# EAGLE board Schematic1 (EAGLE 9.3.0)
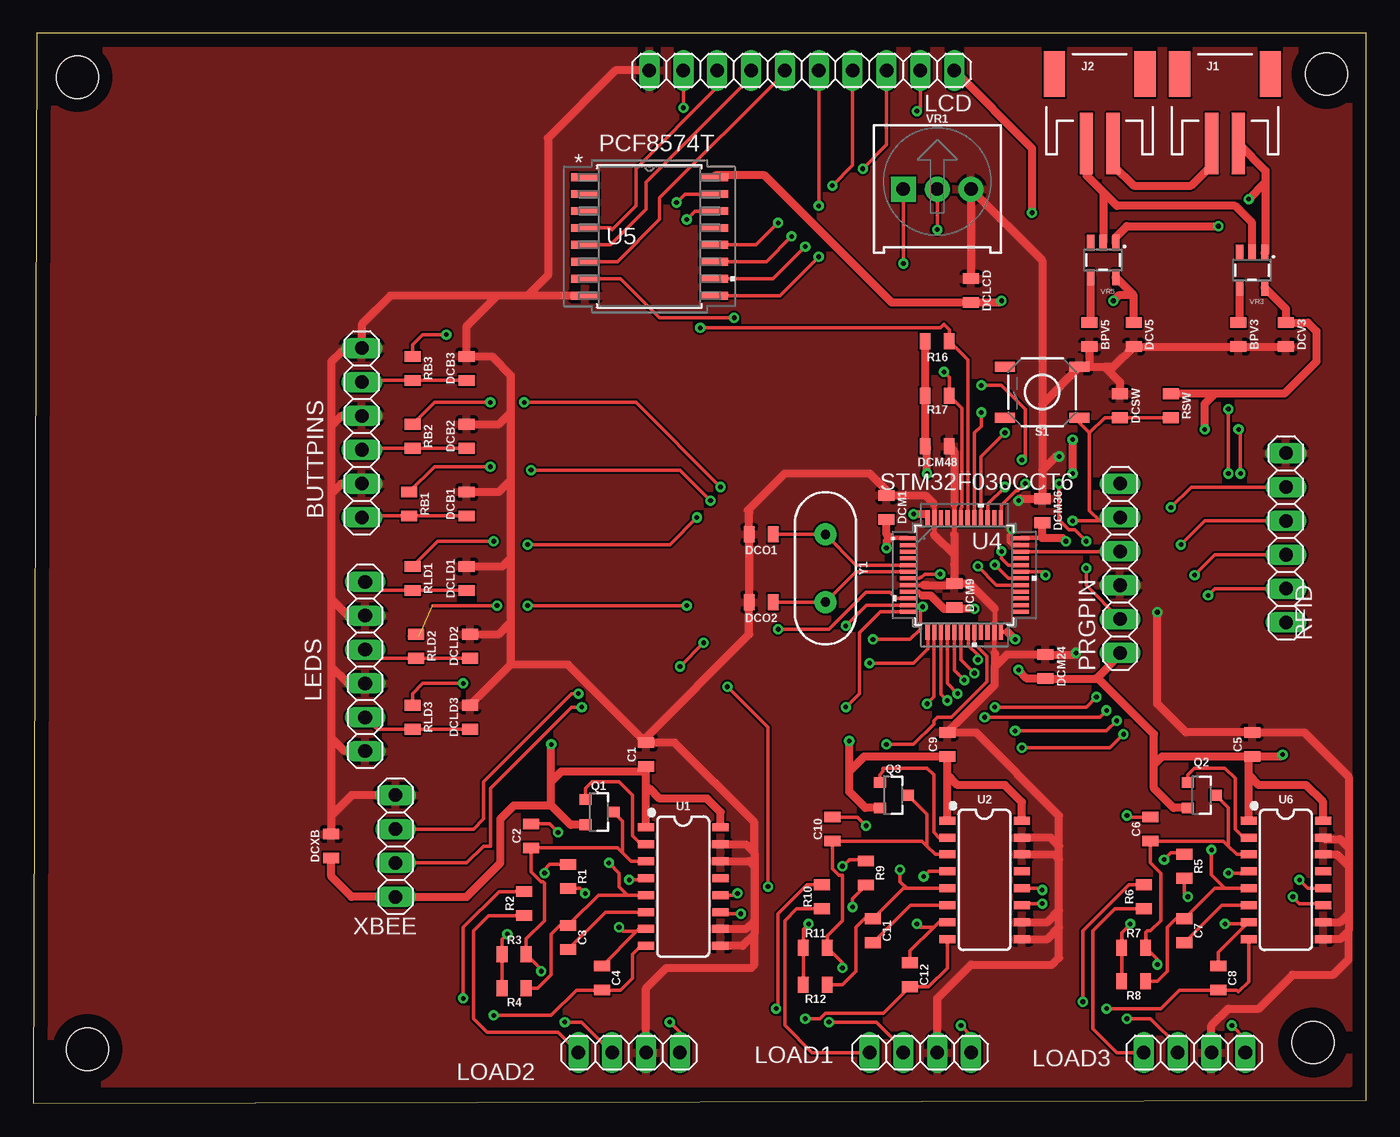
[diagram p0: board, top side]
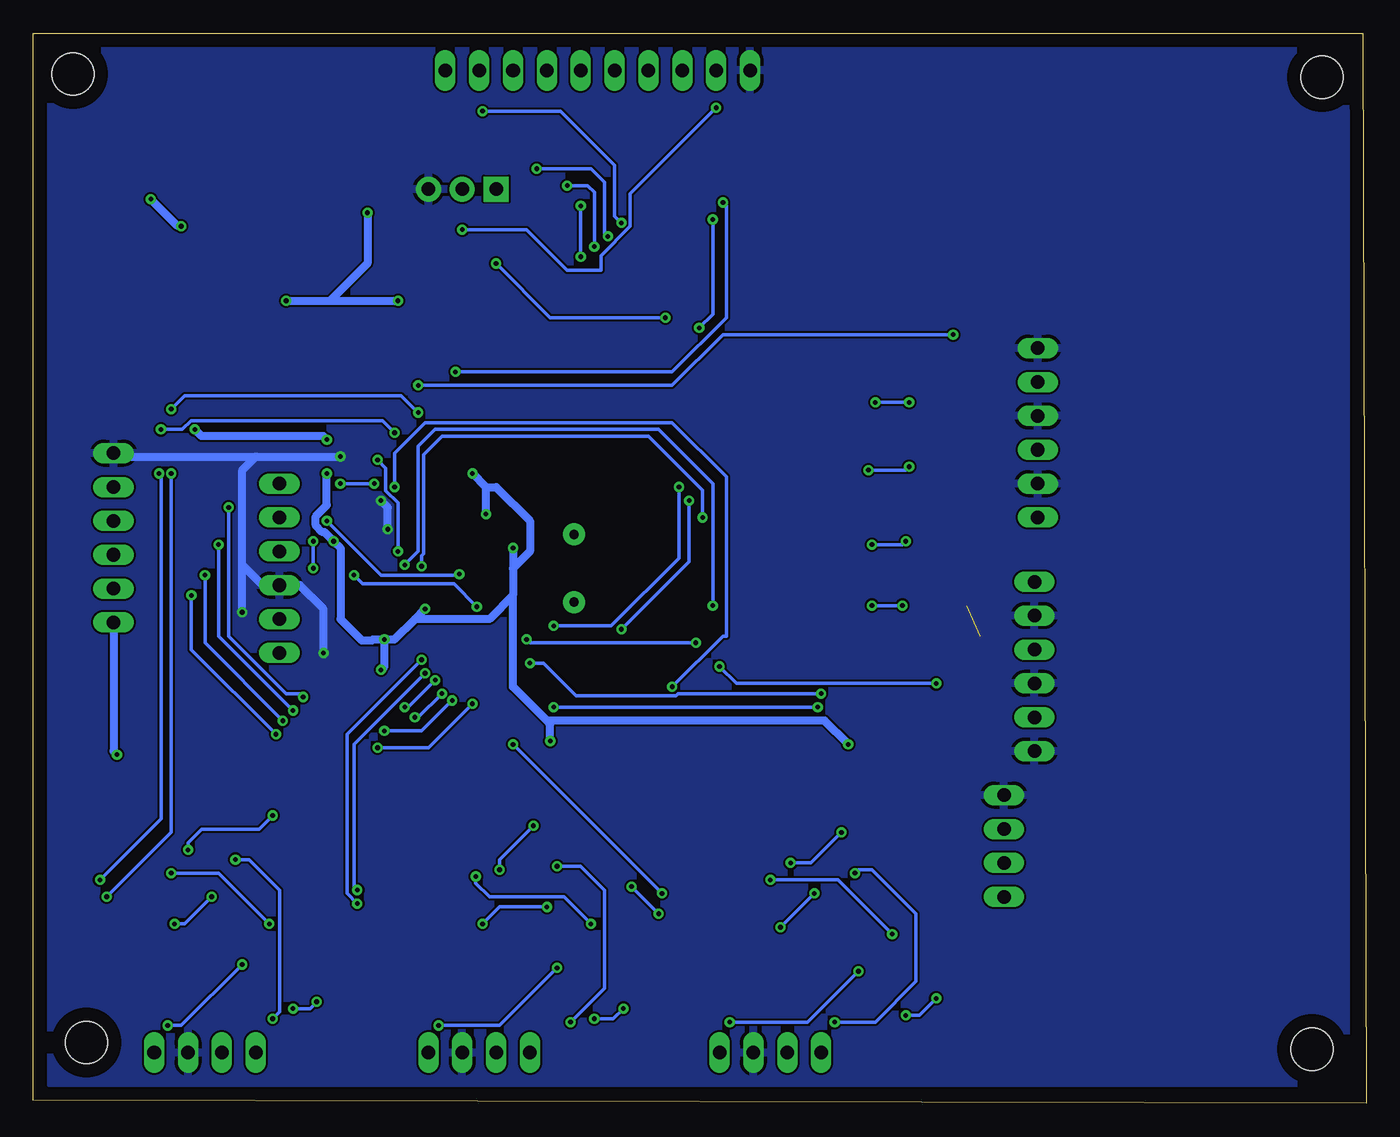
[diagram p1: board, bottom side, seen from below]

Size 100 x 80.25 mm. Coordinates in mm from the lower left corner, seen from the top.
Outline: 0,0 100,0.25 100,80.25 0.25,80.25 0,0
Copper layers (1*16): Top 0.035mm / dielectric 1.5mm / Bottom 0.035mm
Design rules "default": minimum track width 6mil, minimum drill 0.35mm, track to track 6mil, track to pad 6mil, pad to pad 6mil, via to via 6mil, smd to smd 6mil, copper to edge 40mil, drill to drill 6mil, minimum pad ring 10mil, minimum via ring 8mil, stop-mask expansion 4mil, vias tented up to drill 0mil, thermal gap 10mil
Holes 3.17 mm at 3.3,76.96 4.06,4.06 96.01,4.57 97.03,77.22

## Footprints (pad centres in the part's own frame; a part is rotated, then mirrored left to right if it is on the bottom)
0805 = smd 0.8 x 1.2: 1 -0.9,0; 2 0.9,0
1X06 = drill 1.016 long: 1 -6.35,0; 2 -3.81,0; 3 -1.27,0; 4 1.27,0; 5 3.81,0; 6 6.35,0
JST-2-SMD = smd 1 x 4.6: 1 -1,-3.7; 2 1,-3.7 | smd 1.6 x 3.4: NC1 -3.4,1.5; NC2 3.4,1.5
1X10 = drill 1.016 long: 1 -11.43,0; 2 -8.89,0; 3 -6.35,0; 4 -3.81,0; 5 -1.27,0; 6 1.27,0; 7 3.81,0; 8 6.35,0; 9 8.89,0; 10 11.43,0
1X04 = drill 1.016 long: 1 -3.81,0; 2 -1.27,0; 3 1.27,0; 4 3.81,0
SOT23-3 = smd 0.8 x 0.9: 1 -0.95,-1; 2 0.95,-1; 3 0,1.1
TACTILE_SWITCH_SMD_5.2MM = smd 1.524 x 0.762: 1 -2.794,1.905; 2 2.794,1.905; 3 -2.794,-1.905; 4 2.794,-1.905
SO16 = smd 0.6 x 1.2: 1 -4.445,-2.8; 2 -3.175,-2.8; 3 -1.905,-2.8; 4 -0.635,-2.8; 5 0.635,-2.8; 6 1.905,-2.8; 7 3.175,-2.8; 8 4.445,-2.8; 9 4.445,2.8; 10 3.175,2.8; 11 1.905,2.8; 12 0.635,2.8; 13 -0.635,2.8; 14 -1.905,2.8; 15 -3.175,2.8; 16 -4.445,2.8
LQFP48-7X7MM = smd 1.194 x 0.305: 1 -4.25,2.75; 2 -4.25,2.25; 3 -4.25,1.75; 4 -4.25,1.25; 5 -4.25,0.75; 6 -4.25,0.25; 7 -4.25,-0.25; 8 -4.25,-0.75; 9 -4.25,-1.25; 10 -4.25,-1.75; 11 -4.25,-2.25; 12 -4.25,-2.75; 25 4.25,-2.75; 26 4.25,-2.25; 27 4.25,-1.75; 28 4.25,-1.25; 29 4.25,-0.75; 30 4.25,-0.25; 31 4.25,0.25; 32 4.25,0.75; 33 4.25,1.25; 34 4.25,1.75; 35 4.25,2.25; 36 4.25,2.75 | smd 0.305 x 1.194: 13 -2.75,-4.25; 14 -2.25,-4.25; 15 -1.75,-4.25; 16 -1.25,-4.25; 17 -0.75,-4.25; 18 -0.25,-4.25; 19 0.25,-4.25; 20 0.75,-4.25; 21 1.25,-4.25; 22 1.75,-4.25; 23 2.25,-4.25; 24 2.75,-4.25; 37 2.75,4.25; 38 2.25,4.25; 39 1.75,4.25; 40 1.25,4.25; 41 0.75,4.25; 42 0.25,4.25; 43 -0.25,4.25; 44 -0.75,4.25; 45 -1.25,4.25; 46 -1.75,4.25; 47 -2.25,4.25; 48 -2.75,4.25
SOT162-1-M = smd 2.108 x 0.584: 1 -4.826,4.445; 2 -4.826,3.175; 3 -4.826,1.905; 4 -4.826,0.635; 5 -4.826,-0.635; 6 -4.826,-1.905; 7 -4.826,-3.175; 8 -4.826,-4.445; 9 4.826,-4.445; 10 4.826,-3.175; 11 4.826,-1.905; 12 4.826,-0.635; 13 4.826,0.635; 14 4.826,1.905; 15 4.826,3.175; 16 4.826,4.445
TRIMPOT-PTH-3386U = drill 1.016 pad 1.88 square: 1 -2.54,-0.015 | drill 1.016 pad 1.88: 2 0,-0.015; 3 2.54,-0.015
SOT23-5 = smd 0.55 x 1.2: 1 -0.95,-1.3; 2 0,-1.3; 3 0.95,-1.3; 4 0.95,1.3; 5 -0.95,1.3
HC49US = drill 0.7 pad 1.651: 1 -2.54,0; 2 2.54,0

## Placement (x,y rotation side)
BPV3  470pF  [0805]  90.42,57.66 270 top
BPV5  470pF  [0805]  79.25,57.66 270 top
BUTTPINS  [1X06]  24.64,50.29 90 top
C1  10µF  [0805]  45.97,26.16 90 top
C2  10µF  [0805]  37.34,20.07 90 top
C3  0.1µF  [0805]  40.13,12.45 270 top
C4  0.1µF  [0805]  42.67,9.4 270 top
C5  10µF  [0805]  91.44,26.92 90 top
C6  10µF  [0805]  83.82,20.57 90 top
C7  0.1µF  [0805]  86.36,12.95 270 top
C8  0.1µF  [0805]  88.9,9.4 270 top
C9  10µF  [0805]  68.58,26.92 90 top
C10  10µF  [0805]  59.94,20.57 90 top
C11  0.1µF  [0805]  62.99,12.95 270 top
C12  0.1µF  [0805]  65.79,9.65 270 top
DCB1  0.33µF  [0805]  32.51,44.96 90 top
DCB2  0.33µF  [0805]  32.51,50.04 90 top
DCB3  0.33µF  [0805]  32.51,55.12 90 top
DCLCD  0.33µF  [0805]  70.36,60.96 270 top
DCLD1  0.33µF  [0805]  32.51,39.37 90 top
DCLD2  0.33µF  [0805]  32.77,34.29 90 top
DCLD3  0.33µF  [0805]  32.77,28.96 90 top
DCM1  0.33µF  [0805]  64.01,44.7 270 top
DCM9  0.33µF  [0805]  69.09,38.1 270 top
DCM24  0.33µF  [0805]  75.95,32.77 270 top
DCM36  0.33µF  [0805]  75.69,44.45 270 top
DCM48  0.33µF  [0805]  67.82,49.28 180 top
DCO1  0.33µF  [0805]  54.61,42.67 180 top
DCO2  0.33µF  [0805]  54.61,37.59 180 top
DCSW  0.33µF  [0805]  81.53,52.32 270 top
DCV3  2.2µF  [0805]  93.98,57.66 270 top
DCV5  2.2µF  [0805]  82.55,57.66 270 top
DCXB  2.2µF  [0805]  22.35,19.3 90 top
J1  [JST-2-SMD]  89.41,75.69 0 top
J2  [JST-2-SMD]  80.01,75.69 0 top
LCD  [1X10]  57.66,77.47 180 top
LEDS  [1X06]  24.89,32.77 270 top
LOAD1  [1X04]  66.55,3.81 180 top
LOAD2  [1X04]  44.7,3.81 180 top
LOAD3  [1X04]  87.12,3.81 180 top
PRGPIN  [1X06]  81.53,40.13 90 top
Q1  600mA/40V  [SOT23-3]  42.42,21.84 270 top
Q2  600mA/40V  [SOT23-3]  87.63,23.11 270 top
Q3  600mA/40V  [SOT23-3]  64.52,23.11 270 top
R1  [0805]  40.13,17.02 270 top
R2  [0805]  36.83,14.99 90 top
R3  [0805]  36.07,11.18 0 top
R4  [0805]  36.07,8.64 180 top
R5  [0805]  86.36,17.78 270 top
R6  [0805]  83.31,15.49 90 top
R7  [0805]  82.55,11.68 0 top
R8  [0805]  82.55,9.14 180 top
R9  [0805]  62.48,17.27 270 top
R10  [0805]  59.18,15.49 90 top
R11  [0805]  58.67,11.68 0 top
R12  [0805]  58.67,8.89 180 top
R16  4.7k  [0805]  67.82,57.15 180 top
R17  4.7k  [0805]  67.82,53.09 180 top
RB1  1k  [0805]  28.19,44.96 270 top
RB2  1k  [0805]  28.45,50.04 270 top
RB3  1k  [0805]  28.45,55.12 270 top
RFID  [1X06]  93.98,42.42 90 top
RLD1  1k  [0805]  28.45,39.37 270 top
RLD2  1k  [0805]  28.7,34.29 270 top
RLD3  1k  [0805]  28.45,28.96 270 top
RSW  10k  [0805]  85.34,52.32 270 top
S1  [TACTILE_SWITCH_SMD_5.2MM]  75.69,53.34 180 top
U1  HX711  [SO16]  48.77,16.26 270 top
U2  HX711  [SO16]  71.37,16.76 270 top
U4  STM32F0XXC1T  [LQFP48-7X7MM]  69.85,39.62 0 top
U5  PCF8574T/3,512SOT162-1-M  [SOT162-1-M]  46.23,65.02 0 top
U6  HX711  [SO16]  93.98,16.76 270 top
VR1  10k  [TRIMPOT-PTH-3386U]  67.82,68.58 0 top
VR3  3.3V/150mA  [SOT23-5]  91.44,62.48 180 top
VR5  5V  [SOT23-5]  80.26,63.25 180 top
XBEE  [1X04]  27.18,19.3 90 top
Y1  [HC49US]  59.44,40.13 270 top

## Library data of the parts
BPV3 BPV5 DCB1-DCB3 DCLCD DCLD1-DCLD3 DCM1 DCM9 DCM24 DCM36 DCM48 DCO1 DCO2 DCSW DCV3 DCV5 DCXB = SparkFun-Capacitors; PROD_ID: CAP-08469
BUTTPINS LCD LEDS LOAD1-LOAD3 PRGPIN RFID XBEE = pinhead
C1-C12 = SparkFun-Capacitors; PROD_ID: CAP-08469; VALUE: 0.33µF
J1 J2 = SparkFun-Connectors; PROD_ID: CONN-11443; SF_ID: PRT-08612
Q1-Q3 = SparkFun-DiscreteSemi; PROD_ID: TRANS-09245
R1-R12 R16 R17 RB1-RB3 RLD1-RLD3 RSW = SparkFun-Resistors
S1 = SparkFun-Switches; PROD_ID: SWCH-08247; SF_SKU: COM-08720
U1 U2 U6 = SparkFun-IC-Conversion; PROD_ID: IC-12445
U4 = ECE477_Resources; MANUFACTURER_PART_NUMBER: stm32f0xxc1t; VENDOR: STMicroelectronics
U5 = ECE477_Resources; MANUFACTURER_PART_NUMBER: PCF8574T3512; VENDOR: NXP
VR1 = SparkFun-Resistors; PROD_ID: RES-09730; SF_SKU: COM-09806
VR3 = SparkFun-IC-Power; PROD_ID: VREG-00822
VR5 = SparkFun-IC-Power; PROD_ID: VREG-00823
Y1 = SparkFun-Clocks

## Nets
A: U5.7 VR1.1
A0: RB1.1 U4.10
A1: RB2.1 U4.11
A2: U4.12 XBEE.2
A3: U4.13 XBEE.3
A4: RFID.2 U4.14
A5: RFID.3 U4.15
A6: RFID.4 U4.16
A7: RFID.5 U4.17
A8: RLD1.1 U4.29
A9: RLD2.1 U4.30
A10: RLD3.1 U4.31
A11: RB3.1 U4.32
B: LCD.9 VR1.2
B6: R16.1 U4.42 U5.14
B7: R17.1 U4.43 U5.15
D0: LCD.8 U5.4
D1: LCD.7 U5.5
D2: LCD.6 U5.6
D4: LCD.5 U5.9
D5: LCD.4 U5.10
D6: LCD.3 U5.11
D7: LCD.2 U5.12
GND: BPV3.2 BPV5.2 BUTTPINS.2 BUTTPINS.4 BUTTPINS.6 C1.2 C5.2 C9.2 DCB1.2 DCB2.2 DCB3.2 DCLCD.1 DCLD1.2 DCLD2.2 DCLD3.2 DCM1.1 DCM9.1 DCM24.1 DCM36.1 DCM48.1 DCO1.2 DCO2.2 DCSW.1 DCV3.2 DCV5.2 DCXB.2 LCD.10 LEDS.2 LEDS.4 LEDS.6 LOAD1.2 LOAD2.2 LOAD3.2 PRGPIN.3 RFID.6 S1.3 U1.9 U1.10 U1.14 U1.15 U2.9 U2.10 U2.14 U2.15 U4.8 U4.23 U4.35 U4.44 U4.47 U5.8 U6.9 U6.10 U6.14 U6.15 VR1.3 XBEE.4
GND_IN: J2.1 VR3.2 VR5.2
N$1: J1.1 J2.2
N$2: LOAD2.3 R1.1
N$3: LOAD2.4 R2.1
N$4: C4.1 R1.2 U1.7
N$5: C4.2 R2.2 U1.8
N$6: Q1.1 U1.2
N$7: C2.1 LOAD2.1 Q1.3 R3.2 U1.3
N$8: C2.2 C3.1 R4.1 U1.5
N$9: R3.1 R4.2 U1.4
N$10: DCLD1.1 LEDS.1 RLD1.2
N$11: C3.2 U1.6
N$12: LOAD3.3 R5.1
N$13: LOAD3.4 R6.1
N$14: C8.1 R5.2 U6.7
N$15: C8.2 R6.2 U6.8
N$16: Q2.1 U6.2
N$17: C6.1 LOAD3.1 Q2.3 R7.2 U6.3
N$18: C6.2 C7.1 R8.1 U6.5
N$19: R7.1 R8.2 U6.4
N$20: C7.2 U6.6
N$21: DCO1.1 U4.5 Y1.1
N$22: DCO2.1 U4.6 Y1.2
N$23: LOAD1.3 R9.1
N$24: LOAD1.4 R10.1
N$25: C12.1 R9.2 U2.7
N$26: C12.2 R10.2 U2.8
N$27: Q3.1 U2.2
N$28: C10.1 LOAD1.1 Q3.3 R11.2 U2.3
N$29: C10.2 C11.1 R12.1 U2.5
N$30: R11.1 R12.2 U2.4
N$31: C11.2 U2.6
N$32: DCLD2.1 LEDS.3 RLD2.2
N$33: DCLD3.1 LEDS.5 RLD3.2
N$34: BPV3.1 VR3.4
N$35: BUTTPINS.1 DCB1.1 RB1.2
N$36: BUTTPINS.3 DCB2.1 RB2.2
N$37: BPV5.1 VR5.4
N$38: BUTTPINS.5 DCB3.1 RB3.2
N$54: U4.41 U6.11
N$55: U4.40 U6.12
N$56: U1.11 U4.39
N$57: U1.12 U4.20
N$58: U2.11 U4.19
N$59: U2.12 U4.18
P3V: C1.1 C5.1 C9.1 DCM1.2 DCM9.2 DCM24.2 DCM36.2 DCM48.2 DCV3.1 DCXB.1 PRGPIN.1 Q1.2 Q2.2 Q3.2 R16.2 R17.2 RFID.1 RSW.1 U1.1 U1.16 U2.1 U2.16 U4.1 U4.9 U4.24 U4.36 U4.48 U6.1 U6.16 VR3.5 XBEE.1
P5V: DCLCD.2 DCV5.1 LCD.1 U5.16 VR5.5
PWR_IN: J1.2 VR3.1 VR5.1
RST: DCSW.2 PRGPIN.5 RSW.2 S1.1 U4.7
SWCLK: PRGPIN.2 U4.37
SWDIO: PRGPIN.4 U4.34

## Tracks (layer width: path | path; a pad name or v marks a point on that pad's centre or on a via)
A  (via drill 0.35)
  Top 0.254: U5.7 44.07,61.85 46.99,58.93 v52.58,58.93 | v65.28,62.99 VR1.1
  Bottom 0.254: v52.58,58.93 61.21,58.93 v65.28,62.99
A0  (via drill 0.35)
  Top 0.254: U4.10 64.74,37.87 64.26,38.35 62.48,38.35 59.69,35.56 v55.88,35.56 | v50.8,45.21 48.51,47.5 v37.34,47.5 | v34.29,47.75 30.09,47.75 RB1.1
  Bottom 0.254: v55.88,35.56 50.8,40.64 v50.8,45.21 | v37.34,47.5 34.54,47.5 v34.29,47.75
A1  (via drill 0.35)
  Top 0.254: U4.11 62.52,37.37 v60.96,35.81 | v51.56,46.23 45.21,52.58 v36.83,52.58 | v34.29,52.58 30.09,52.58 RB2.1
  Bottom 0.254: v60.96,35.81 56.64,35.81 51.56,40.89 v51.56,46.23 | v36.83,52.58 v34.29,52.58
A2  (via drill 0.35)
  Top 0.254: XBEE.2 32.51,18.03 33.78,19.3 34.29,19.3 34.29,23.62 40.39,29.72 v41.15,29.72 | v60.96,29.72 61.98,30.73 61.98,35.31 63.54,36.87 U4.12
  Bottom 0.254: v41.15,29.72 v60.96,29.72
A3  (via drill 0.35)
  Top 0.254: XBEE.3 33.02,20.57 33.78,21.34 33.78,24.13 40.39,30.73 v40.89,30.73 | v62.74,33.02 66.04,33.02 67.1,34.08 U4.13
  Bottom 0.254: v40.89,30.73 51.65,30.73 51.8,30.58 59.29,30.58 61.72,33.02 v62.74,33.02
A4  (via drill 0.35)
  Top 0.254: U4.14 67.56,35.34 67.56,33.27 67.56,33.02 67.56,30.48 v67.06,29.97 | v74.17,26.67 80.77,26.67 v81.79,27.69 | v88.14,38.1 88.65,38.61 RFID.2
  Bottom 0.254: v67.06,29.97 70.36,26.67 v74.17,26.67 | v81.79,27.69 88.14,34.04 v88.14,38.1
A5  (via drill 0.35)
  Top 0.254: U4.15 68.1,30.69 v68.57,30.22 | v73.66,27.94 80.52,27.94 v81.28,28.7 | v87.12,39.62 88.65,41.15 RFID.3
  Bottom 0.254: v68.57,30.22 70.85,27.94 v73.66,27.94 | v81.28,28.7 87.12,34.54 v87.12,39.62
A6  (via drill 0.35)
  Top 0.254: U4.16 68.58,35.35 68.58,31.5 v69.34,30.73 | v71.37,28.96 80.01,28.96 v80.52,29.46 | v86.11,41.91 87.88,43.69 RFID.4
  Bottom 0.254: v69.34,30.73 71.12,28.96 v71.37,28.96 | v80.52,29.46 86.11,35.05 v86.11,41.91
A7  (via drill 0.35)
  Top 0.254: U4.17 69.1,33.27 69.1,33.03 69.1,32.48 69.33,32.25 v69.84,31.74 | v72.14,29.72 78.99,29.72 v79.76,30.48 | v85.34,44.7 86.87,46.23 RFID.5
  Bottom 0.254: v69.84,31.74 71.87,29.72 v72.14,29.72 | v79.76,30.48 80.01,30.73 81.03,30.73 85.34,35.05 v85.34,44.7
A8  (via drill 0.35)
  Top 0.254: U4.29 72.27,38.87 v70.87,40.28 | v49.78,43.94 47.75,41.91 v37.08,41.91 | v34.54,42.16 30.34,42.16 RLD1.1
  Bottom 0.254: v70.87,40.28 70.87,41.08 70.71,41.23 70.71,48.67 69.34,50.04 53.85,50.04 49.78,45.97 v49.78,43.94 | v37.08,41.91 34.8,41.91 v34.54,42.16
A9  (via drill 0.35)  (1 unrouted)
  Top 0.254: U4.30 73.15,39.37 v72.14,40.39 | v49.02,37.34 37.34,37.34 | 28.96,35.05 28.19,35.05 28.33,35.19 RLD2.1 | 37.34,37.34 | 37.34,37.34 v37.08,37.34 | v34.8,37.34 29.97,37.34
  Bottom 0.254: v72.14,40.39 71.12,41.4 71.12,49.28 69.85,50.55 53.09,50.55 49.02,46.48 49.02,37.59 48.77,37.34 v49.02,37.34 | v37.08,37.34 v34.8,37.34
A10  (via drill 0.35)
  Top 0.254: RLD3.1 28.45,30.73 29.21,31.5 v32.26,31.5 | v48.51,32.77 v50.29,34.54 | v62.99,34.8 65.79,34.8 66.55,35.56 66.55,37.08 66.71,37.25 v66.73,37.25 | v75.95,39.62 75.7,39.87 U4.31
  Bottom 0.254: v32.26,31.5 47.24,31.5 v48.51,32.77 | v50.29,34.54 62.74,34.54 v62.99,34.8 | v66.73,37.25 68.45,38.97 71.37,38.97 71.63,38.97 75.29,38.97 v75.95,39.62
A11  (via drill 0.35)
  Top 0.254: RB3.1 28.45,56.9 29.21,57.66 v30.99,57.66 | v72.64,41.4 72.64,40.89 73.16,40.37 U4.32 | v71.12,53.85 72.64,53.85 74.42,52.07 74.42,48.51 v74.17,48.26
  Bottom 0.254: v30.99,57.66 48.26,57.66 52.07,53.85 v71.12,53.85 | v72.64,41.4 72.64,45.04 73.56,45.96 73.56,47.65 v74.17,48.26
B  (via drill 0.35)
  Top 0.254: VR1.2 v67.82,65.53 | v48.77,74.68 LCD.9
  Bottom 0.254: v67.82,65.53 62.99,65.53 59.94,62.48 57.4,62.48 57.4,63.59 55.22,65.77 55.22,68.22 v48.77,74.68
B6  (via drill 0.35)
  Top 0.254: U4.42 70.1,55.77 R16.1 68.72,58.03 68.33,58.42 68.07,58.17 v50.04,58.17 | v49.02,66.29 49.66,66.93 U5.14
  Bottom 0.254: v50.04,58.17 49.02,59.18 v49.02,66.29
B7  (via drill 0.35)
  Top 0.254: U4.43 69.6,44.62 69.68,44.7 69.68,52.12 R17.1 68.72,54.47 v68.33,54.86 | v48.26,67.56 48.9,68.2 U5.15
  Bottom 0.254: v68.33,54.86 52.07,54.86 48.01,58.93 48.01,67.31 v48.26,67.56
D0
  Top 0.254: U5.4 43.31,65.66 43.43,65.53 45.21,67.31 45.21,70.1 51.31,76.2 LCD.8
D1
  Top 0.254: U5.5 43.31,64.39 45.97,67.06 45.97,69.09 53.85,76.96 LCD.7
D2
  Top 0.254: LCD.6 56.39,77.31 46.99,67.91 46.99,66.29 43.81,63.12 U5.6
D4  (via drill 0.35)
  Top 0.254: U5.9 56.01,60.58 v58.93,63.5 | v58.93,67.31 LCD.5
  Bottom 0.254: v58.93,63.5 v58.93,67.31
D5  (via drill 0.35)
  Top 0.254: U5.10 55.5,61.85 v57.91,64.26 | v59.94,68.83 61.47,70.36 LCD.4
  Bottom 0.254: v57.91,64.26 57.91,68.33 58.42,68.83 v59.94,68.83
D6  (via drill 0.35)
  Top 0.254: U5.11 54.99,63.12 v56.9,65.02 | v62.23,70.1 64.01,71.88 LCD.3
  Bottom 0.254: v56.9,65.02 57.15,65.28 57.15,69.09 58.17,70.1 v62.23,70.1
D7  (via drill 0.35)
  Top 0.254: U5.12 54.23,64.39 v55.88,66.04 | v66.29,74.42 66.55,74.68 LCD.2
  Bottom 0.254: v55.88,66.04 56.39,66.55 56.39,70.36 60.45,74.42 v66.29,74.42
GND  (via drill 0.35)
  Top 0.305: U4.35 74.08,41.89 73.4,41.89 73.2,42.09 73.2,42.65 73.41,42.86 v73.41,43.06 | U4.8 67.04,38.87 67.06,38.86
  Top 0.356: 72.14,33.78 72.1,33.82 U4.23 72.12,35.39 72.12,36.11 72.14,36.13 72.14,37.08 | 69.09,42.67 69.1,42.68 U4.44 69.1,44.95 69.09,44.96 | 67.56,44.96 67.6,44.92 U4.47 67.6,42.67 67.58,42.65
  Top 0.61: 75.69,52.45 S1.3 79.25,55.24 | 75.69,52.45 75.69,47.5 | 75.69,47.5 DCM36.1 74.05,45.35 v73.91,45.21 | v76.96,48.51 76.71,48.51 75.69,47.5 | v78.23,33.78 78.12,33.67 DCM24.1 73.04,33.67 72.14,32.77 | 79.25,55.24 80.39,55.24 | DCSW.1 81.53,54.1 80.39,55.24 | U5.8 37.08,60.58 | 37.08,60.58 34.8,60.58 | 34.8,60.58 26.8,60.58 24.64,58.42 BUTTPINS.6 24.38,56.39 23.11,56.39 22.35,55.63 22.35,50.8 | 35.81,51.82 35.81,54.61 34.41,56.02 DCB3.2 32.51,58.29 34.8,60.58 | 35.81,51.82 35.81,46.74 | 35.81,46.74 35.81,40.89 | 35.81,40.89 35.81,36.07 | 35.81,36.07 35.81,32.9 | 35.81,32.9 DCLD3.2 | C1.2 45.97,27.43 53.71,35.17 DCO2.2 DCO1.2 53.71,44.33 53.59,44.45 56.39,47.24 62.74,47.24 64.01,45.97 DCM1.1 66.92,45.6 67.56,44.96 | DCLD2.2 34.94,35.19 35.81,36.07 | DCLD1.2 35.19,40.27 35.81,40.89 | DCB1.2 34.94,45.86 35.81,46.74 | DCB2.2 34.94,50.94 35.81,51.82 | XBEE.4 23.88,23.11 22.35,21.59 | 22.35,21.59 DCXB.2 | 22.35,45.72 22.35,37.85 | 22.35,37.85 22.35,32.77 | 22.35,32.77 22.35,27.43 | 22.35,27.43 22.35,21.59 | BUTTPINS.2 23.11,46.48 22.35,45.72 | BUTTPINS.4 23.11,51.56 22.35,50.8 | 22.35,50.8 22.35,45.72 | U1.15 53.47,19.43 54.1,18.8 | 54.1,18.8 54.1,17.78 | 54.1,17.78 54.1,13.72 | 54.1,13.72 54.1,12.7 | U1.9 53.21,11.81 54.1,12.7 | U1.10 53.47,13.08 54.1,13.72 | U1.14 53.72,18.16 54.1,17.78 | U6.15 96.91,19.81 98.04,19.81 98.68,19.18 | 98.68,19.18 98.68,17.78 | 98.68,17.78 98.68,14.22 | 98.68,14.22 98.68,12.95 | 98.68,12.95 98.04,12.32 U6.9 | U6.10 98.04,13.59 98.68,14.22 | U6.14 97.79,18.67 98.68,17.78 | U2.9 76.07,12.32 76.96,13.21 | 76.96,13.21 76.96,14.48 | 76.96,14.48 76.96,18.29 | 76.96,18.29 76.96,19.3 | 76.96,19.3 76.33,19.94 U2.15
  Top 0.61: U2.14 76.58,18.67 76.96,18.29 | 54.1,18.8 54.1,21.08 48.12,27.06 C1.2 | C1.2 40.13,32.9 35.81,32.9 | 72.14,32.77 72.14,31.38 C9.2 70.73,27.82 76.96,21.59 76.96,19.3 | 72.14,33.78 72.14,32.77 | 98.68,19.18 98.68,24.51 95.37,27.82 C5.2 86.48,27.82 84.33,29.97 v84.33,36.83 | BPV5.2 79.25,55.24 | 80.39,55.24 81.04,55.24 DCV5.2 BPV3.2 94.35,56.76 | 75.69,52.45 75.69,63.23 VR1.3 DCLCD.1 | U2.10 76.07,13.59 76.96,14.48 | 98.68,12.95 98.68,10.79 97.54,9.65 94.49,9.65 91.95,7.11 89.66,7.11 88.39,5.84 LOAD3.2 | 76.96,13.21 76.96,10.92 76.45,10.41 70.36,10.41 67.82,7.87 LOAD1.2 | 54.1,12.7 54.1,10.41 53.85,10.16 47.5,10.16 45.97,8.64 LOAD2.2 | DCM9.1 68.95,38.86 67.06,38.86 66.8,38.86 | DCM9.1 70.22,39 72.14,37.08 | 67.58,42.65 69.09,41.15 69.09,40.39 | 69.09,40.39 DCM9.1 | 69.1,42.68 69.1,40.4 69.09,40.39 | DCM48.1 69.1,48.89 69.1,44.95 | LEDS.2 23.62,36.58 22.35,37.85 | LEDS.4 23.62,31.5 22.35,32.77 | LEDS.6 23.37,26.42 22.35,27.43 | LCD.10 43.69,77.47 38.61,72.39 38.61,62.1 37.08,60.58
  Bottom 0.61: 84.33,40.39 82.8,38.86 PRGPIN.3 80.01,38.86 78.23,37.08 v78.23,33.78 | 84.33,40.39 84.33,47.5 83.31,48.51 | 83.31,48.51 v76.96,48.51 | v84.33,36.83 84.33,40.39 | RFID.6 93.73,48.51 83.31,48.51 | v73.41,43.06 73.41,44.7 v73.91,45.21
  pour Top: 1.27,1.52 98.81,1.52 98.81,79.25 1.27,79.25
  pour Bottom: 1.52,1.52 98.81,1.52 98.81,79.5 1.52,79.5
GND_IN
  Top 0.61: J2.1 79.01,69.6 80.28,68.33 | 80.28,68.33 80.28,64.56 VR5.2 | VR3.2 91.44,66.04 90.17,67.31 81.3,67.31 80.28,68.33
N$1
  Top 0.61: 81.01,71.14 J2.2 81.01,70.37 82.55,68.83 86.87,68.83 88.41,70.37 J1.1
N$2  (via drill 0.35)
  Top 0.254: LOAD2.3 41.15,6.1 v39.88,6.1 | v38.35,17.27 38.35,17.53 38.75,17.92 R1.1
  Bottom 0.254: v39.88,6.1 36.83,6.1 33.78,9.14 33.78,14.22 37.08,17.53 38.1,17.53 v38.35,17.27
N$3
  Top 0.254: LOAD2.4 39.37,5.33 34.04,5.33 33.02,6.35 33.02,12.95 34.15,14.09 R2.1
N$4  (via drill 0.35)
  Top 0.254: C4.1 45.27,12.9 | 45.27,12.9 45.45,13.08 U1.7 | R1.2 41.03,16.12 v41.4,15.75 | v43.94,13.21 44.25,12.9 45.27,12.9
  Bottom 0.254: v41.4,15.75 v43.94,13.21
N$5  (via drill 0.35)
  Top 0.254: U1.8 45.59,11.81 44.96,11.18 44.96,9.4 44.06,8.5 C4.2 40.76,8.5 38.86,6.6 v34.54,6.6 | R2.2 34.94,15.89 32.26,13.21 v32.26,7.87
  Bottom 0.254: v32.26,7.87 33.53,6.6 v34.54,6.6
N$6
  Top 0.254: Q1.1 41.42,23.64 41.91,24.13 43.94,24.13 44.96,23.11 44.96,20.07 45.59,19.43 U1.2
N$7  (via drill 0.35)
  Top 0.254: Q1.3 44.2,21.17 44.2,18.8 | 44.2,18.8 44.83,18.16 U1.3 | 44.2,18.8 43.83,19.17 C2.1 37.34,17.36 38.08,16.61 38.25,16.61 38.35,16.51 38.35,13.72 36.97,12.33 R3.2 38.1,10.04 v38.1,9.91 | v47.75,6.1 48.51,5.33 LOAD2.1
  Bottom 0.254: v38.1,9.91 41.91,6.1 v47.75,6.1
N$8  (via drill 0.35)
  Top 0.254: C3.1 40.32,13.53 | 40.32,13.53 42.41,15.62 44.58,15.62 | 44.58,15.62 U1.5 | C2.2 38.72,20.97 v39.37,20.32 | v43.18,18.03 43.94,17.27 43.94,16.26 44.58,15.62 | R4.1 37.85,8.64 38.86,9.65 38.86,12.7 39.69,13.53 40.32,13.53
  Bottom 0.254: v39.37,20.32 41.66,18.03 v43.18,18.03
N$9  (via drill 0.35)
  Top 0.254: R4.2 R3.1 35.17,12.31 v35.56,12.7 | v44.7,16.76 45.84,16.76 U1.4
  Bottom 0.254: v35.56,12.7 39.62,16.76 v44.7,16.76
N$10
  Top 0.254: DCLD1.1 RLD1.2 25.54,38.47 LEDS.1
N$11
  Top 0.254: C3.2 42.94,14.35 U1.6
N$12  (via drill 0.35)
  Top 0.254: LOAD3.3 85.85,4.32 83.82,6.35 v82.04,6.35 | v84.84,18.29 85.34,18.8 86.24,18.8 R5.1
  Bottom 0.254: v82.04,6.35 81.53,6.86 81.53,16 83.82,18.29 v84.84,18.29
N$13
  Top 0.254: LOAD3.4 81.28,3.81 79.5,5.59 79.5,12.95 81.14,14.59 R6.1
N$14  (via drill 0.35)
  Top 0.254: C8.1 88.9,11.33 90.46,12.9 90.49,12.9 U6.7 91.05,13.46 v89.41,13.46 | R5.2 86.36,15.75 v86.61,15.49
  Bottom 0.254: v86.61,15.49 88.65,13.46 v89.41,13.46
N$15  (via drill 0.35)
  Top 0.254: U6.8 91.18,9.14 90.42,8.38 90.31,8.5 C8.2 85.97,8.5 84.58,7.11 v80.52,7.11 | R6.2 82.18,16.39 78.74,12.95 v78.74,7.62
  Bottom 0.254: v78.74,7.62 79.25,7.11 v80.52,7.11
N$16
  Top 0.254: Q2.1 86.61,24.08 86.61,24.64 87.12,25.15 89.41,25.15 90.17,24.38 90.17,20.57 90.81,19.94 U6.2
N$17  (via drill 0.35)
  Top 0.254: Q2.3 89.66,22.18 89.66,19.3 | 89.66,19.3 90.3,18.67 U6.3 | 89.66,19.3 89.29,19.67 C6.1 83.82,18.03 84.58,17.27 84.58,13.72 83.82,12.95 83.57,12.95 83.45,12.84 R7.2 84.33,10.81 v84.33,10.41 | v89.92,5.84 90.93,4.83 LOAD3.1
  Bottom 0.254: v84.33,10.41 88.9,5.84 v89.92,5.84
N$18  (via drill 0.35)
  Top 0.254: 89.41,16.13 88.64,16.13 C7.1 85.74,13.85 85.09,13.21 85.09,9.91 84.33,9.14 R8.1 | 89.41,16.13 U6.5 | C6.2 82.16,21.47 v82.04,21.59 | v88.39,19.02 88.39,17.14 89.41,16.13
  Bottom 0.254: v82.04,21.59 83.06,20.57 87.38,20.57 88.39,19.56 v88.39,19.02
N$19  (via drill 0.35)
  Top 0.254: R8.2 R7.1 81.65,12.82 v82.3,13.46 | v89.66,17.27 91.05,17.27 U6.4
  Bottom 0.254: v82.3,13.46 86.11,17.27 v89.66,17.27
N$20
  Top 0.254: C7.2 89.17,14.86 U6.6
N$21
  Top 0.254: U4.5 61.73,40.37 Y1.1 DCO1.1
N$22
  Top 0.254: U4.6 61.72,39.87 Y1.2 DCO2.1
N$23  (via drill 0.35)
  Top 0.254: LOAD1.3 65.28,4.06 63.25,6.1 v59.69,6.1 | v60.71,17.78 61.21,18.29 62.37,18.29 R9.1
  Bottom 0.254: v59.69,6.1 57.15,8.64 57.15,16 58.93,17.78 v60.71,17.78
N$24
  Top 0.254: LOAD1.4 58.42,3.81 56.39,5.84 56.39,13.72 57.27,14.59 R10.1
N$25  (via drill 0.35)
  Top 0.254: C12.1 65.79,11.43 67.56,13.21 | 67.56,13.21 67.94,13.59 U2.7 | R9.2 61.47,15.36 v61.47,14.73 | v66.29,13.46 66.55,13.21 67.56,13.21
  Bottom 0.254: v61.47,14.73 65.02,14.73 v66.29,13.46
N$26  (via drill 0.35)
  Top 0.254: U2.8 68.57,10.15 67.17,8.75 C12.2 63.79,6.75 59.42,6.75 59.01,6.35 v57.91,6.35 | R10.2 58.05,16.39 55.88,14.22 55.88,7.26 v55.73,7.11
  Bottom 0.254: v55.73,7.11 56.49,6.35 v57.91,6.35
N$27
  Top 0.254: Q3.1 63.5,24.08 63.5,24.64 63.75,24.89 63.75,25.15 67.06,25.15 67.56,24.64 67.56,20.32 67.94,19.94 U2.2
N$28  (via drill 0.35)
  Top 0.254: Q3.3 67.06,21.67 67.06,19.3 | 67.06,19.3 67.69,18.67 U2.3 | 67.06,19.3 66.69,19.67 C10.1 59.94,17.61 60.43,17.12 60.71,17.12 60.71,13.72 59.57,12.58 R11.2 60.71,10.55 v60.71,10.16 | v69.6,5.84 70.36,5.08 LOAD1.1
  Bottom 0.254: v60.71,10.16 65.02,5.84 v69.6,5.84
N$29  (via drill 0.35)
  Top 0.254: C11.1 63.05,13.91 | 63.05,13.91 65.27,16.13 65.53,16.13 | 65.53,16.13 U2.5 | C10.2 61.84,21.47 v62.48,20.83 | v65.02,17.53 65.02,16.64 65.53,16.13 | R12.1 60.71,8.89 61.72,9.91 61.72,13.21 62.43,13.91 63.05,13.91
  Bottom 0.254: v62.48,20.83 65.02,18.29 v65.02,17.53
N$30  (via drill 0.35)
  Top 0.254: R12.2 R11.1 57.77,13.07 v58.17,13.46 | v66.8,17.02 67.18,17.4 U2.4
  Bottom 0.254: v58.17,13.46 60.2,15.49 65.79,15.49 66.8,16.51 v66.8,17.02
N$31
  Top 0.254: C11.2 65.8,14.86 U2.6
N$32
  Top 0.254: DCLD2.1 RLD2.2 25.54,33.39 LEDS.3
N$33
  Top 0.254: DCLD3.1 RLD3.2 25.79,28.06 LEDS.5
N$34
  Top 0.61: VR3.4 90.49,58.62 BPV3.1
N$35
  Top 0.254: DCB1.1 RB1.2 24.75,44.06 BUTTPINS.1
N$36
  Top 0.254: DCB2.1 RB2.2 24.75,49.14 BUTTPINS.3
N$37
  Top 0.61: VR5.4 79.31,58.62 BPV5.1
N$38
  Top 0.254: DCB3.1 RB3.2 24.75,54.22 BUTTPINS.5
N$54  (via drill 0.35)
  Top 0.254: U6.11 96.65,14.99 95,14.99 v94.49,15.49 | v89.66,47.24 v89.66,52.07 | v71.12,51.82 71.12,50.8 70.61,50.29 70.61,43.89 U4.41
  Bottom 0.254: v94.49,15.49 89.66,20.32 v89.66,47.24 | v89.66,52.07 88.65,53.09 72.39,53.09 v71.12,51.82
N$55  (via drill 0.35)
  Top 0.254: U6.12 95.63,16.13 v95,16.76 | v90.57,47.24 90.57,50.4 v90.42,50.55 | v72.9,50.29 71.1,48.49 U4.40
  Bottom 0.254: v95,16.76 90.42,21.34 90.42,47.24 v90.57,47.24 | v90.42,50.55 88.81,50.55 88.16,51.2 73.81,51.2 v72.9,50.29
N$56  (via drill 0.35)
  Top 0.254: U1.11 51.7,14.22 v53.09,14.22 | v55.12,16.26 55.12,28.19 v52.07,31.24 | U4.39 71.63,43.9 71.63,44.96 v72.9,46.23
  Bottom 0.254: v53.09,14.22 v55.12,16.26 | v52.07,31.24 48.26,35.05 48.01,35.05 48.01,46.99 52.07,51.05 70.61,51.05 72.9,48.77 v72.9,46.23
N$57  (via drill 0.35)
  Top 0.254: U1.12 52.7,15.62 v52.83,15.75 | v64.01,26.92 66.04,26.92 67.56,28.45 67.56,28.7 67.82,28.96 68.89,28.96 71.55,31.62 71.55,33.53 70.6,34.48 U4.20
  Bottom 0.254: v52.83,15.75 v64.01,26.92
N$58  (via drill 0.35)
  Top 0.254: U2.11 74.3,14.99 v75.69,14.99 | U4.19 70.17,35.31 70.17,34.34 70.87,33.64 v70.87,33.27
  Bottom 0.254: v75.69,14.99 76.45,15.75 76.45,27.69 v70.87,33.27
N$59  (via drill 0.35)
  Top 0.254: U2.12 75.56,16.13 v75.69,16 | U4.18 69.6,33.27 v70.61,32.26
  Bottom 0.254: v75.69,16 75.95,16.26 75.95,26.92 v70.61,32.26
P3V  (via drill 0.35)
  Top 0.305: U4.24 73.08,35.37 | U4.9 66.43,38.37 66.7,38.1 | U4.48 66.78,44.2
  Top 0.356: U4.36 74.14,42.42 75.69,42.42 | U4.1 65.56,42.42 64.26,42.42
  Top 0.61: PRGPIN.1 81.28,33.53 81.42,33.53 79.83,31.94 | 79.83,31.94 79.76,31.87 DCM24.2 74.56,31.87 v73.91,32.51 | U6.1 91.18,24.64 | 91.18,24.64 91.18,25.76 C5.1 | U6.16 96.77,22.61 95.5,23.88 91.94,23.88 91.18,24.64 | Q2.2 85.53,22.16 84.07,23.62 84.07,25.4 | 84.07,25.4 84.7,26.02 C5.1 | U2.1 68.58,24.64 | 68.58,24.64 C9.1 62.35,26.02 61.21,24.89 | U2.16 74.17,22.6 72.9,23.88 69.34,23.88 68.58,24.64 | Q3.2 62.42,22.16 61.21,23.37 61.21,24.89 | U1.1 45.97,23.62 | 45.97,23.62 C1.1 45.6,24.89 39.62,24.89 38.86,24.13 | U1.16 51.57,21.84 50.55,22.86 46.99,22.86 46.23,23.62 45.97,23.62 | Q1.2 40.32,20.89 38.86,22.35 | 38.86,22.35 38.86,24.13 | DCXB.1 22.35,17.02 23.88,15.49 XBEE.1 32.51,15.49 35.05,18.03 35.05,21.34 36.07,22.35 38.86,22.35 | v70.61,37.08 69.2,37.08 | 69.2,37.08 DCM9.2 | v77.47,42.16 77.22,42.42 75.69,42.42 DCM36.2 | DCM1.2 64.01,42.67 64.26,42.42 64.01,42.16 v64.01,41.66 | v67.06,47.24 67.06,49.14 DCM48.2 R17.2 R16.2 | 84.07,25.4 84.07,27.69 79.83,31.94 | 38.86,24.13 v38.86,26.92 | 61.21,24.89 v61.21,27.18 | VR3.5 93.98,59.59 DCV3.1 95.62,58.56 96.27,57.91 96.27,55.63 93.86,53.22 88.65,53.22 | 88.65,53.22 RSW.1 | v77.98,47.24 v77.98,49.78 | v87.88,50.55 87.88,52.46 88.65,53.22 | C5.1 93.59,26.02 v93.73,26.16 | 73.08,35.37 v73.66,34.8 | 66.7,38.1 67.31,38.1 68.33,37.08 69.2,37.08 | 66.78,44.2 v66.04,44.2
  Bottom 0.61: v73.66,34.8 72.9,34.8 71.37,36.32 | 71.37,36.32 v70.61,37.08 | v73.91,32.51 73.66,32.77 v73.66,34.8 | v73.66,34.8 74.51,34.8 74.58,34.72 75.36,34.72 76.96,36.32 76.96,41.66 v77.47,42.16 78.16,42.85 78.32,42.85 78.81,43.34 78.81,44.03 77.98,44.87 v77.98,47.24 | v64.01,41.66 64.01,40.13 | 64.01,40.13 64.01,38.1 | 71.37,36.32 65.79,36.32 64.01,38.1 | v66.04,44.2 66.04,46.23 | 66.04,46.23 v67.06,47.24 | 66.04,46.23 65.28,46.23 62.74,43.69 62.74,41.4 64.01,40.13 | v38.86,26.92 40.64,28.7 61.47,28.7 | 61.47,28.7 64.01,31.24 64.01,38.1 | v61.21,27.18 61.21,28.45 61.47,28.7 | v77.98,49.78 78.23,50.04 87.38,50.04 v87.88,50.55 | RFID.1 93.98,26.42 v93.73,26.16
P5V  (via drill 0.35)
  Top 0.61: DCV5.1 82.55,60.61 | 82.55,60.61 VR5.5 | 82.55,60.61 81.44,60.61 v81.03,60.2 | v72.64,60.2 72.51,60.06 DCLCD.2 64.4,60.06 54.86,69.6 51.18,69.6 U5.16 | LCD.1 74.93,71.63 v74.93,66.8
  Bottom 0.61: v81.03,60.2 77.72,60.2 | 77.72,60.2 v72.64,60.2 | v74.93,66.8 74.93,62.99 77.72,60.2
PWR_IN  (via drill 0.35)
  Top 0.61: 92.44,69.07 92.44,68.33 92.44,63.83 VR3.1 | v88.9,65.79 82.04,65.79 81.21,64.96 VR5.1 | v91.19,67.82 92.44,69.07 | J1.2 92.44,69.96 92.44,69.07
  Bottom 0.61: v88.9,65.79 89.15,65.79 v91.19,67.82
RST  (via drill 0.35)
  Top 0.254: 80.01,43.69 v77.98,43.69 | 80.01,43.69 81.28,43.69 PRGPIN.5 | S1.1 78.49,51.05 79.25,50.29 | 80.01,43.69 79.25,44.45 79.25,50.29 | 79.25,50.29 80.38,51.42 DCSW.2 RSW.2 | U4.7 66.49,39.37 66.56,39.45 66.62,39.45 66.88,39.7 v68.03,39.7
  Bottom 0.254: v77.98,43.69 73.91,39.62 68.11,39.62 v68.03,39.7
SWCLK  (via drill 0.35)
  Top 0.254: U4.37 72.64,43.83 72.64,44.87 73.71,45.93 73.87,45.93 v74.42,46.48 | PRGPIN.2 78.99,38.86 v78.99,40.13 | v78.99,42.16 78.13,43.03 77.71,43.03 76.96,43.77 v76.96,46.48
  Bottom 0.254: v78.99,40.13 v78.99,42.16 | v76.96,46.48 v74.42,46.48
SWDIO
  Top 0.254: U4.34 81.51,41.37 PRGPIN.4